# EAGLE board finish (EAGLE 6.5.0)
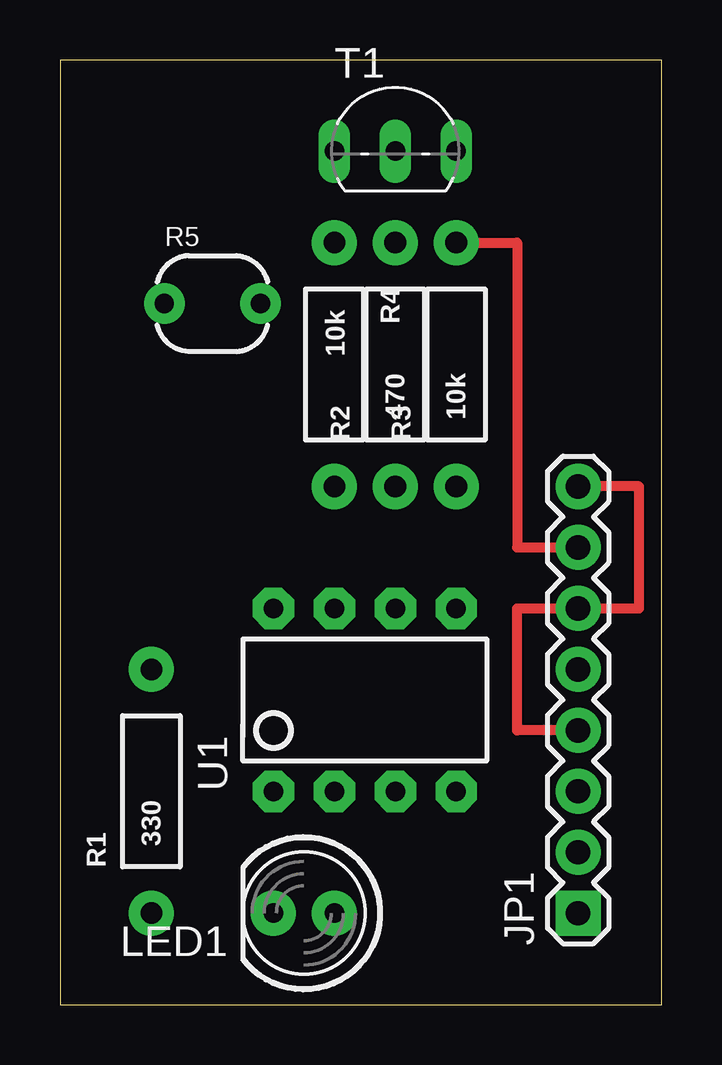
[diagram p0: board, top side]
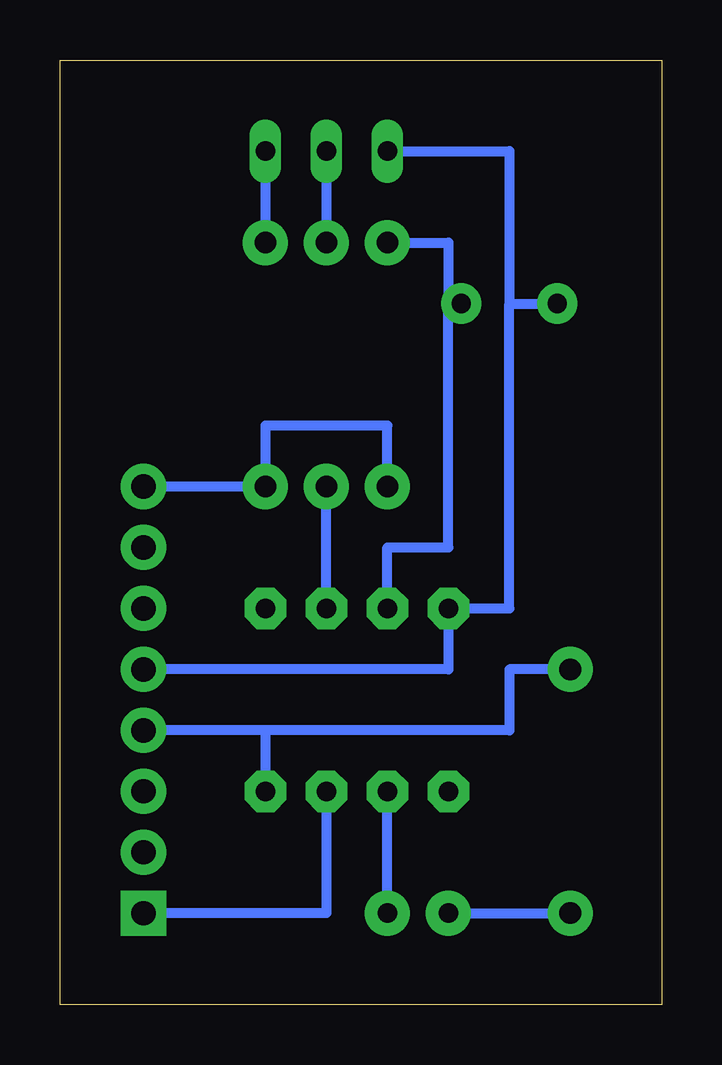
[diagram p1: board, bottom side, seen from below]

Size 25.07 x 39.36 mm. Coordinates in mm from the lower left corner, seen from the top.
Outline: 0,0 25.07,0 25.07,39.36 0,39.36 0,0
Copper layers (1*16): Top 0.035mm / dielectric 1.5mm / Bottom 0.035mm
Design rules "default": minimum track width 10mil, minimum drill 24mil, track to track 8mil, track to pad 8mil, pad to pad 8mil, via to via 8mil, smd to smd 8mil, copper to edge 40mil, drill to drill 8mil, minimum pad ring 10mil, minimum via ring 8mil, stop-mask expansion 4mil, vias tented up to drill 0mil, thermal gap 10mil

## Footprints (pad centres in the part's own frame; a part is rotated, then mirrored left to right if it is on the bottom)
1X08 = drill 1.016 pad 1.88 square: 1 0,0 | drill 1.016 pad 1.88: 2 2.54,0; 3 5.08,0; 4 7.62,0; 5 10.16,0; 6 12.7,0; 7 15.24,0; 8 17.78,0
LED5MM = drill 0.813 pad 1.88: A -1.27,0; K 1.27,0
AXIAL-0.4 = drill 0.9 pad 1.88: P$1 -5.08,0; P$2 5.08,0
PHOTOCELL = drill 0.8 pad 1.676: 1 -2,0; 2 2,0
TO92-EBC = drill 0.813 long: B 0,-1.27; C 2.54,-1.27; E -2.54,-1.27
DIP08 = drill 0.813 pad 1.727 octagon: 1 -3.81,-3.81; 2 -1.27,-3.81; 3 1.27,-3.81; 4 3.81,-3.81; 5 3.81,3.81; 6 1.27,3.81; 7 -1.27,3.81; 8 -3.81,3.81

## Placement (x,y rotation side)
JP1  [1X08]  21.59,3.81 90 top
LED1  [LED5MM]  10.16,3.81 180 top
R1  330  [AXIAL-0.4]  3.81,8.89 90 top
R2  470  [AXIAL-0.4]  13.97,26.67 90 top
R3  10k  [AXIAL-0.4]  16.51,26.67 90 top
R4  10k  [AXIAL-0.4]  11.43,26.67 270 top
R5  PHOTOCELLPTH  [PHOTOCELL]  6.35,29.21 0 top
T1  [TO92-EBC]  13.97,36.83 0 top
U1  TINY85-20-DIP  [DIP08]  12.7,12.7 0 top

## Library data of the parts
JP1 = SparkFun-Connectors
LED1 = SparkFun-LED
R1-R4 = SparkFun-Resistors
R5 = SparkFun-Sensors
T1 = transistor-neu-to92
U1 = SparkFun-DigitalIC; PROD_ID: IC-09445

## Nets
5V: JP1.5 R5.1 T1.E U1.8
GND: JP1.4 JP1.6 JP1.8 R1.P$2 R3.P$1 R4.P$2 U1.4
N$1: LED1.K R1.P$1
N$2: LED1.A U1.2
N$3: R2.P$2 T1.B
SENSE: R4.P$1 R5.2 U1.7
SIGIN: R2.P$1 U1.6
SIGOUT: JP1.7 R3.P$2 T1.C
TX: JP1.1 U1.3

## Tracks (layer width: path | path; a pad name or v marks a point on that pad's centre or on a via)
5V
  Bottom 0.406: JP1.5 8.89,13.97 U1.8 6.35,16.51 6.35,29.21 | T1.E 6.35,35.56 6.35,29.21 | 6.35,29.21 R5.1
GND
  Top 0.406: JP1.4 19.05,11.43 19.05,16.51 JP1.6 24.13,16.51 24.13,21.59 JP1.8
  Bottom 0.406: R1.P$2 6.35,13.97 6.35,11.43 16.51,11.43 | 16.51,11.43 U1.4 | 16.51,11.43 JP1.4 | R4.P$2 11.43,24.13 16.51,24.13 R3.P$1 JP1.8
N$1
  Bottom 0.406: LED1.K R1.P$1
N$2
  Bottom 0.406: LED1.A U1.2
N$3
  Bottom 0.406: T1.B R2.P$2
SENSE
  Bottom 0.406: U1.7 11.43,19.05 8.89,19.05 8.89,29.21 | 8.89,29.21 R5.2 | R4.P$1 8.89,31.75 8.89,29.21
SIGIN
  Bottom 0.406: U1.6 R2.P$1
SIGOUT
  Top 0.406: R3.P$2 19.05,31.75 19.05,19.05 JP1.7
  Bottom 0.406: T1.C R3.P$2
TX
  Bottom 0.406: U1.3 13.97,3.81 JP1.1